# Altium PCB PCB1.pcbdoc
Units mm, origin at the board's own origin, x right, y up, seen from the top; angles counter-clockwise.
Board outline 69.85 x 44.96 mm, 2 copper layers (Top Layer, Bottom Layer); 6 components, 33 nets, 52 pads, 0 vias.
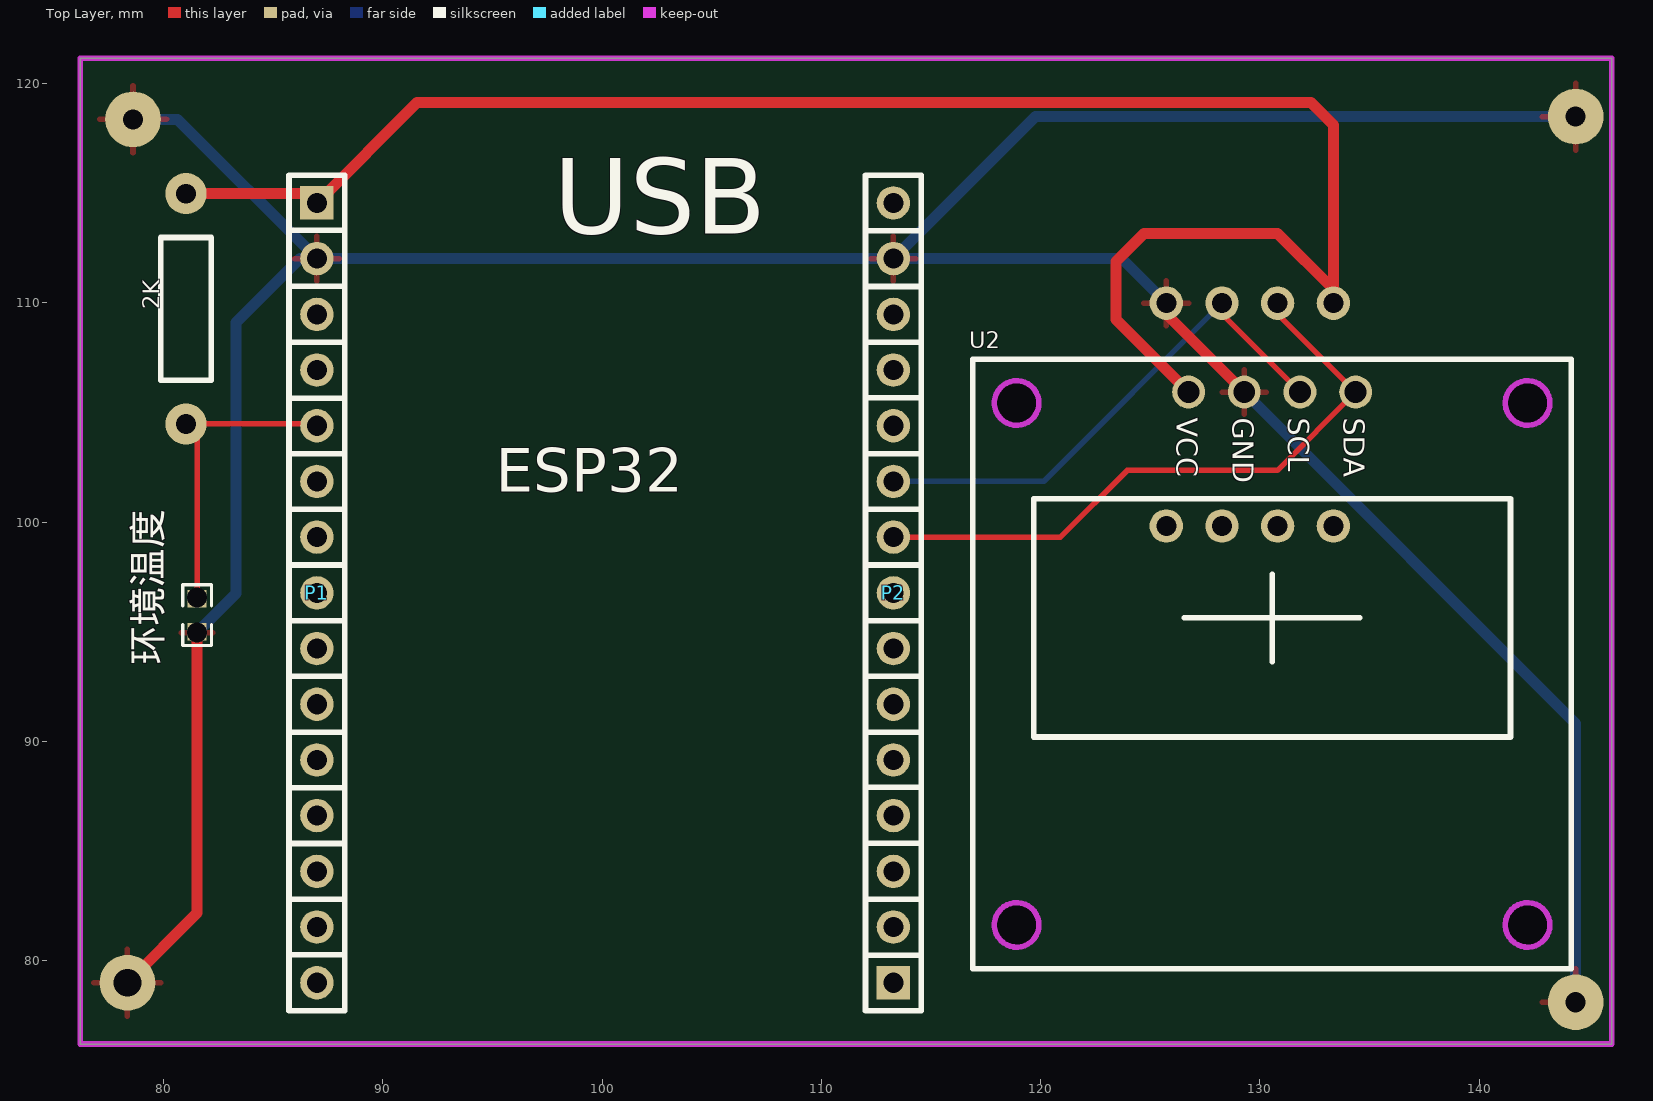
[diagram p0: Top Layer view]
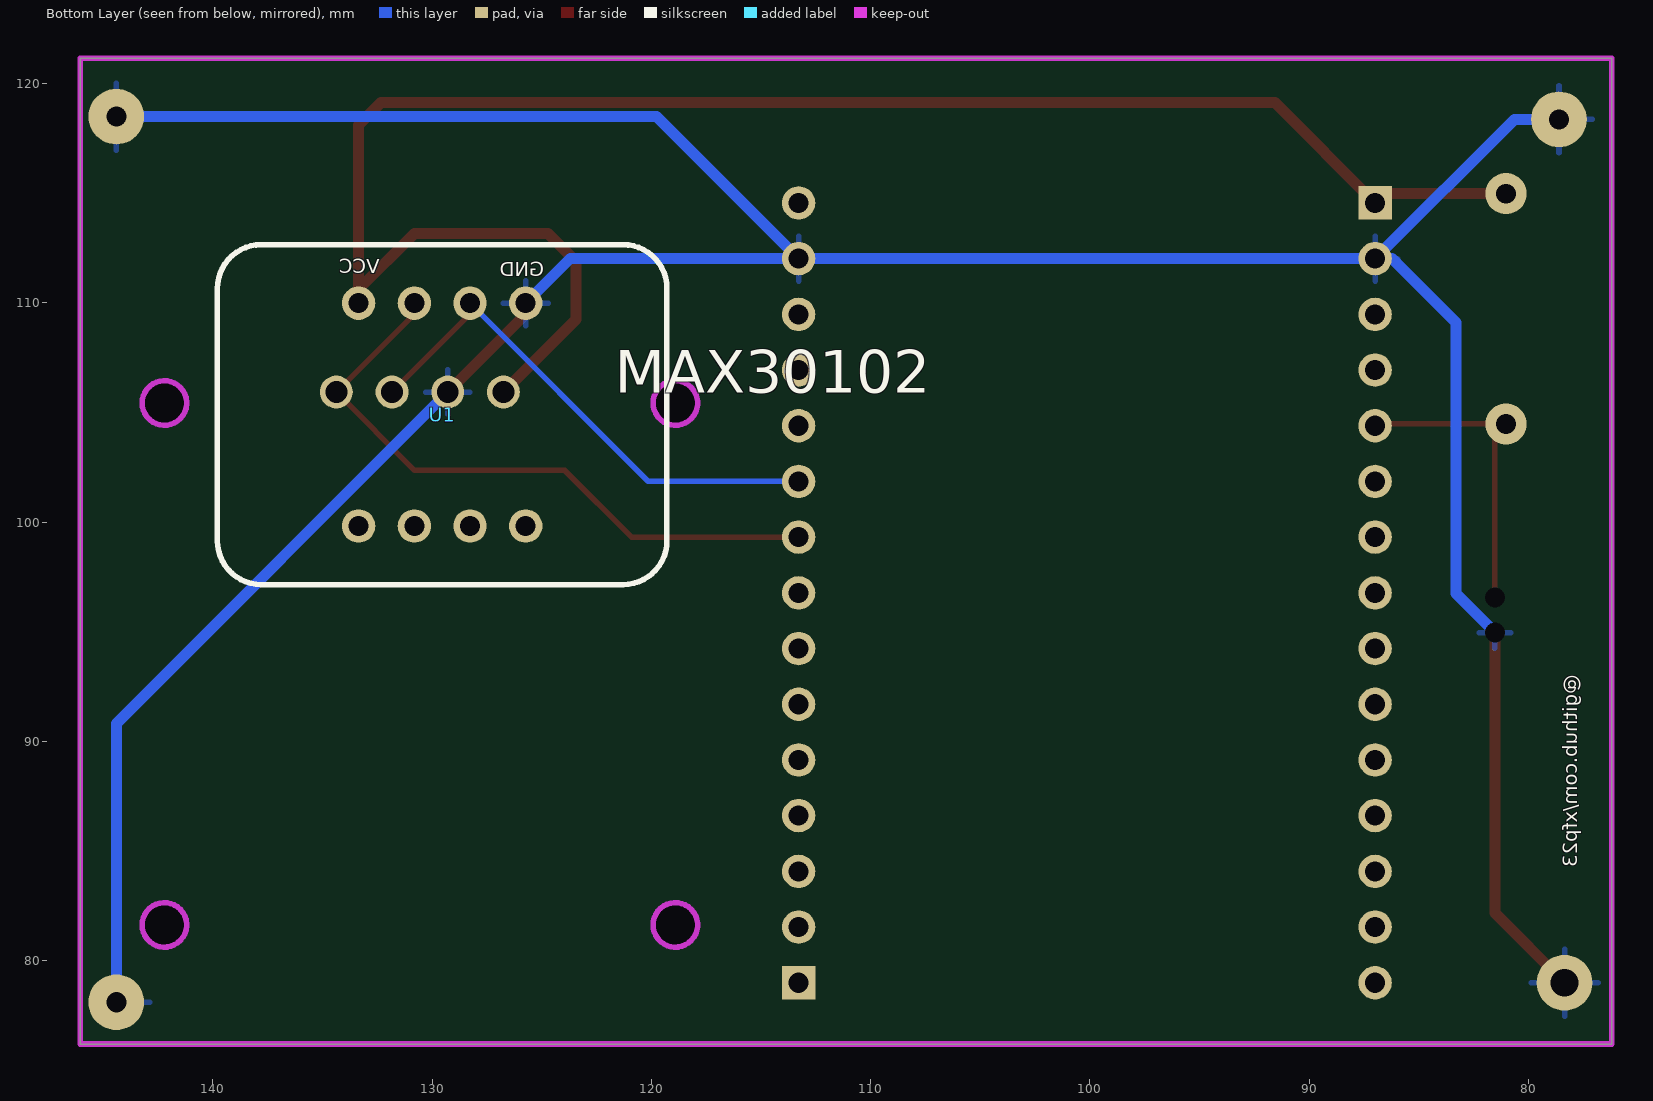
[diagram p1: Bottom Layer view, seen from below]

## Layer stack, top to bottom
Top Layer: signal copper (thickness not stored)
Dielectric: dielectric 0.32, FR-4, Dk 4.8
Bottom Layer: signal copper (thickness not stored)

## Board outline
76.2,76.2 146.05,76.2 146.05,121.158 76.2,121.158

## Design rules (kind name [scope] priority, off if disabled: settings)
Clearance copperThickness1oz [All] p1: gap=0.178 ignorepadtopadclearanceinfootprint=FALSE except(0.102: Track-Track; 0.152: Track-SMDPad SMDPad-SMDPad Track-THPad SMDPad-THPad THPad-THPad Track-Via SMDPad-Via THPad-Via Via-Via SMDPad-Fill THPad-Fill Via-Fill Fill-Fill Track-Region SMDPad-Region THPad-Region Via-Region Region-Region Track-Poly SMDPad-Poly THPad-Poly Via-Poly Fill-Poly Region-Poly Poly-Poly Track-Text SMDPad-Text THPad-Text Via-Text Fill-Text Region-Text Poly-Text Text-Text; 0.175: Track-Hole SMDPad-Hole THPad-Hole Via-Hole Fill-Hole Region-Hole Poly-Hole Text-Hole Sheet-Hole; 0.3: Track-Fill Fill-Region Track-Sheet SMDPad-Sheet THPad-Sheet Via-Sheet Fill-Sheet Region-Sheet Poly-Sheet Text-Sheet)
Clearance copperThickness2oz [All] p1: gap=0.178 ignorepadtopadclearanceinfootprint=FALSE except(0.152: Track-SMDPad SMDPad-SMDPad Track-THPad SMDPad-THPad THPad-THPad Track-Via SMDPad-Via THPad-Via Via-Via SMDPad-Fill THPad-Fill Via-Fill Fill-Fill Track-Region SMDPad-Region THPad-Region Via-Region Region-Region Track-Poly SMDPad-Poly THPad-Poly Via-Poly Fill-Poly Region-Poly Poly-Poly Track-Text SMDPad-Text THPad-Text Via-Text Fill-Text Region-Text Poly-Text Text-Text; 0.175: Track-Hole SMDPad-Hole THPad-Hole Via-Hole Fill-Hole Region-Hole Poly-Hole Text-Hole Sheet-Hole; 0.203: Track-Track; 0.3: Track-Fill Fill-Region Track-Sheet SMDPad-Sheet THPad-Sheet Via-Sheet Fill-Sheet Region-Sheet Poly-Sheet Text-Sheet)
DiffPairsRouting differentialPair [All] p1: maxuncoupledlength=10 maxlimit=6 mostfreqgap=6 toplayer_minwidth=5 toplayer_prefwidth=10 toplayer_maxwidth=100 bottomlayer_minwidth=5 bottomlayer_prefwidth=10 bottomlayer_maxwidth=100
PasteMaskExpansion pasteMaskExpansion [All] p1:
PlaneConnect innerPlane [All] p1: planeconnectstyle=Relief reliefexpansion=0.508 reliefentries=4 reliefconductorwidth=0.254 reliefairgap=0.254
PolygonConnect copperRegion [All] p1: connectstyle=Relief reliefentries=4 reliefconductorwidth=10 polygonreliefangle="90 Angle" airgapwidth=10
RoutingVias viaSize [All] p1: viastyle="Through Hole" holewidth=12.0078 minholewidth=11.811 maxholewidth=248.0314 width=24.0158 minwidth=19.685 maxwidth=393.7008
SolderMaskExpansion solderMaskExpansion [All] p1: useseparateexpansions=TRUE expansion=2 expansionbottom=2
Width copperThickness1oz [All] p1: maxlimit=100 minlimit=5 preferedwidth=10
Width copperThickness2oz [All] p1: maxlimit=100 minlimit=8 preferedwidth=10

## Components (designator, comment, footprint, x,y, rotation, side; value= is the part's Value field where it differs from the comment)
2K "10K插件电阻" RES-TH_BD2.3-L6.5-P10.50-D0.5 81.026,109.728 r90 top
P1 "排针15pin" 排针15PIN 85.725,115.824 r0 top
P2 "排针15pin" 排针15PIN 114.554,77.724 r180 top
U1 "MAX30102" MAX30102 129.54,104.902 r0 bottom
U2 "OLED12864" OLED12864模块I2C 130.556,95.631 r0 top
环境温度 "10K" footprint_c2d9 81.534,95.758 r90 top

## Footprints (in the part's own frame and the unit in brackets; to place one, negate y for a bottom-side part, rotate by r counter-clockwise, add the part's x,y. Pads: shape width x height; smd on the part's side, far side on the other; paste and mask are expansions set on the pad)
footprint_c2d9 [mm]
  rect 0.806x0.864 smd: 1(-0.753,0) 2(0.753,0)
  silkscreen extent -1.39,-0.66 1.39,0.66
MAX30102 [mil]
  round 60 hole 36: 1(-150,200) 2(-50,200) 3(50,200) 4(150,200) 5(150,-200) 6(50,-200) 7(-50,-200) 8(-150,-200)
  silkscreen extent -404,-305 404,305
OLED12864模块I2C [mm]
  round 1.5 hole 1: 1(-3.81,10.3) 2(-1.27,10.3) 3(1.27,10.3) 4(3.81,10.3)
  Multi-Layer board cut-out: -10.634,9.8 -10.735,10.241 -11.017,10.594 -11.424,10.79 -11.876,10.79 -12.283,10.594 -12.565,10.241 -12.666,9.8 -12.666,9.8 -12.565,9.359 -12.283,9.005 -11.876,8.809 -11.424,8.809 -11.016,9.006 -10.735,9.359 -10.634,9.8
  Multi-Layer board cut-out: 12.666,9.8 12.565,10.241 12.283,10.594 11.876,10.79 11.424,10.79 11.016,10.594 10.735,10.241 10.634,9.8 10.634,9.8 10.735,9.359 11.017,9.005 11.424,8.809 11.876,8.809 12.283,9.006 12.565,9.359 12.666,9.8
  Multi-Layer board cut-out: -10.634,-14 -10.735,-13.559 -11.017,-13.206 -11.424,-13.009 -11.876,-13.009 -12.283,-13.206 -12.565,-13.559 -12.666,-14 -12.666,-14 -12.565,-14.441 -12.283,-14.794 -11.876,-14.99 -11.424,-14.99 -11.016,-14.794 -10.735,-14.441 -10.634,-14
  Multi-Layer board cut-out: 12.666,-14 12.565,-13.559 12.283,-13.206 11.876,-13.009 11.424,-13.009 11.016,-13.206 10.735,-13.559 10.634,-14 10.634,-14 10.735,-14.441 11.017,-14.794 11.424,-14.99 11.876,-14.99 12.283,-14.794 12.565,-14.441 12.666,-14
  Multi-Layer keep-out circle w0.254: c-11.65,9.8 r1.016
  Multi-Layer keep-out circle w0.254: c11.65,9.8 r1.016
  Multi-Layer keep-out circle w0.254: c-11.65,-14 r1.016
  Multi-Layer keep-out circle w0.254: c11.65,-14 r1.016
  silkscreen extent -13.65,-16 13.65,11.8
RES-TH_BD2.3-L6.5-P10.50-D0.5 [mil]
  round 74 hole 35.4: 1(-206.7,0) 2(206.7,0)
  silkscreen extent -128,-45 128,45
排针15PIN [mil]
  rect 60x60 hole 36: 1(50,-50)
  round 60 hole 36: 2(50,-150) 3(50,-250) 4(50,-350) 5(50,-450) 6(50,-550) 7(50,-650) 8(50,-750) 9(50,-850) 10(50,-950) 11(50,-1050) 12(50,-1150) 13(50,-1250) 14(50,-1350) 15(50,-1450)
  silkscreen extent 0,-1500 100,0

## Free pads (board coordinates)
  round 2.54 hole 0.914: 1(78.613,118.364) 3(144.399,78.105) 4(144.399,118.491)
  round 0.635 hole 0.914: 1(81.534,96.553) 2(81.534,94.958)
  round 2.54 hole 1.27: 2(78.359,78.994)

## Nets (pads, with @x,y where several pads share a name; then routed paths per layer and width w, separated by ;. In a path a pad name is that pad's centre, name@x,y a point inside that pad or via, vN(x,y) a via of type N, cw(c..) or ccw(c..) an arc to the next point about the centre after c; other vN are vias at no path point)
3V3: 2K.2 P1.1 U1.5 U2.1 | length 81.8
  Top Layer w0.254: U1.5 U1.5@133.35,110.617
  Top Layer w0.5: 2K.2 86.571,114.978 P1.1 91.567,119.126 132.334,119.126 133.35,118.11 133.35,110.617 130.81,113.157 124.714,113.157 123.444,111.887 123.444,109.233 U2.1
$1N1036: U1.4
$1N1040: U1.3
$1N1044: U1.2
$1N1048: U1.1
EN: P2.1
GND: P1.2 P2.14 pad.1@78.613,118.364 pad.2 pad.3 pad.4 U1.8 U2.2 环境温度.1 | length 161
  Top Layer w0.5: pad.2@78.359,78.994 81.534,82.169 pad.2@81.534,94.958 ; U1.8 125.73,109.487 U2.2
  Bottom Layer w0.5: pad.1@78.613,118.364 80.645,118.364 P1.2 ; pad.2@81.534,94.958 83.312,96.736 83.312,109.093 86.233,112.014 P1.2 ; U1.8 123.698,112.014 P2.14 ; U2.2 144.399,90.818 pad.3 ; pad.4 119.761,118.491 P2.14 ; P1.2 P2.14
IO2: P1.4
IO5: P1.8
IO12: P2.12
IO13: P2.13
IO14: P2.11
IO15: P1.3
IO16: P1.6
IO17: P1.7
IO18: P1.9
IO19: P1.10
IO21: P1.11
IO22: P1.14
IO23: P1.15
IO25: P2.8
IO32: P2.6
IO33: P2.7
IO34: P2.4
IO35: P2.5
NTC: 
RX: P1.12
SCL: P2.10 U1.7 U2.3 | length 23.9
  Top Layer w0.254: U1.7 128.27,109.487 U2.3
  Bottom Layer w0.254: P2.10 120.142,101.854 U1.7
SDA: P2.9 U1.6 U2.4 | length 29.3
  Top Layer w0.254: P2.9 120.904,99.314 123.952,102.362 130.797,102.362 U2.4 130.81,109.487 U1.6
TX: P1.13
VIN: P2.15
VN: P2.3
VP: P2.2
pads on no net: 2K.1 P1.5 环境温度.2
copper on no net: | length 14.1
  Top Layer w0.254: 81.534,96.553 81.534,103.97 81.026,104.478 86.911,104.478 86.995,104.394

## Polygon pours and split planes (outlines as drawn)
GND on Top Layer (solid, remove dead copper): 76.2,76.2 146.05,76.2 146.05,120.963 76.2,120.963
GND on Bottom Layer (solid, remove dead copper, pour order 2): 76.2,76.2 146.05,76.2 146.05,121.158 76.2,121.158

## Keep-outs
Board Outline Layer:
  the board outline again, w0.254

## Silkscreen, mask and mechanical layers (free items; w line width, h text height)
Top Silkscreen Layer:
  text "USB" at 97.794,113.159 h3.45
  text "ESP32" at 95.161,101.388 h1.98
Bottom Silkscreen Layer:
  text "VCC" at 132.389,111.347 h0.65
  text "GND" at 124.896,111.22 h0.65
  text "@github.com/xfp23" at 77.772,93.037 h0.65 r270

## Text inside footprints (layer, text, board x,y; h text height)
U2: Top Silkscreen Layer "VCC" at 126.21,104.757 h0.96 r270; Top Silkscreen Layer "GND" at 128.75,104.757 h0.96 r270; Top Silkscreen Layer "SCL" at 131.29,104.757 h0.96 r270; Top Silkscreen Layer "SDA" at 133.83,104.757 h0.96 r270